# Altium PCB BOOST-DRV8711.PcbDoc
Units mil, origin at the board's own origin, x right, y up, seen from the top; angles counter-clockwise.
Board outline 2000 x 1750 mil, 2 copper layers (Top Layer, Bottom Layer), stack 64.8 mil thick; 30 components, 42 nets, 138 pads, 203 vias.
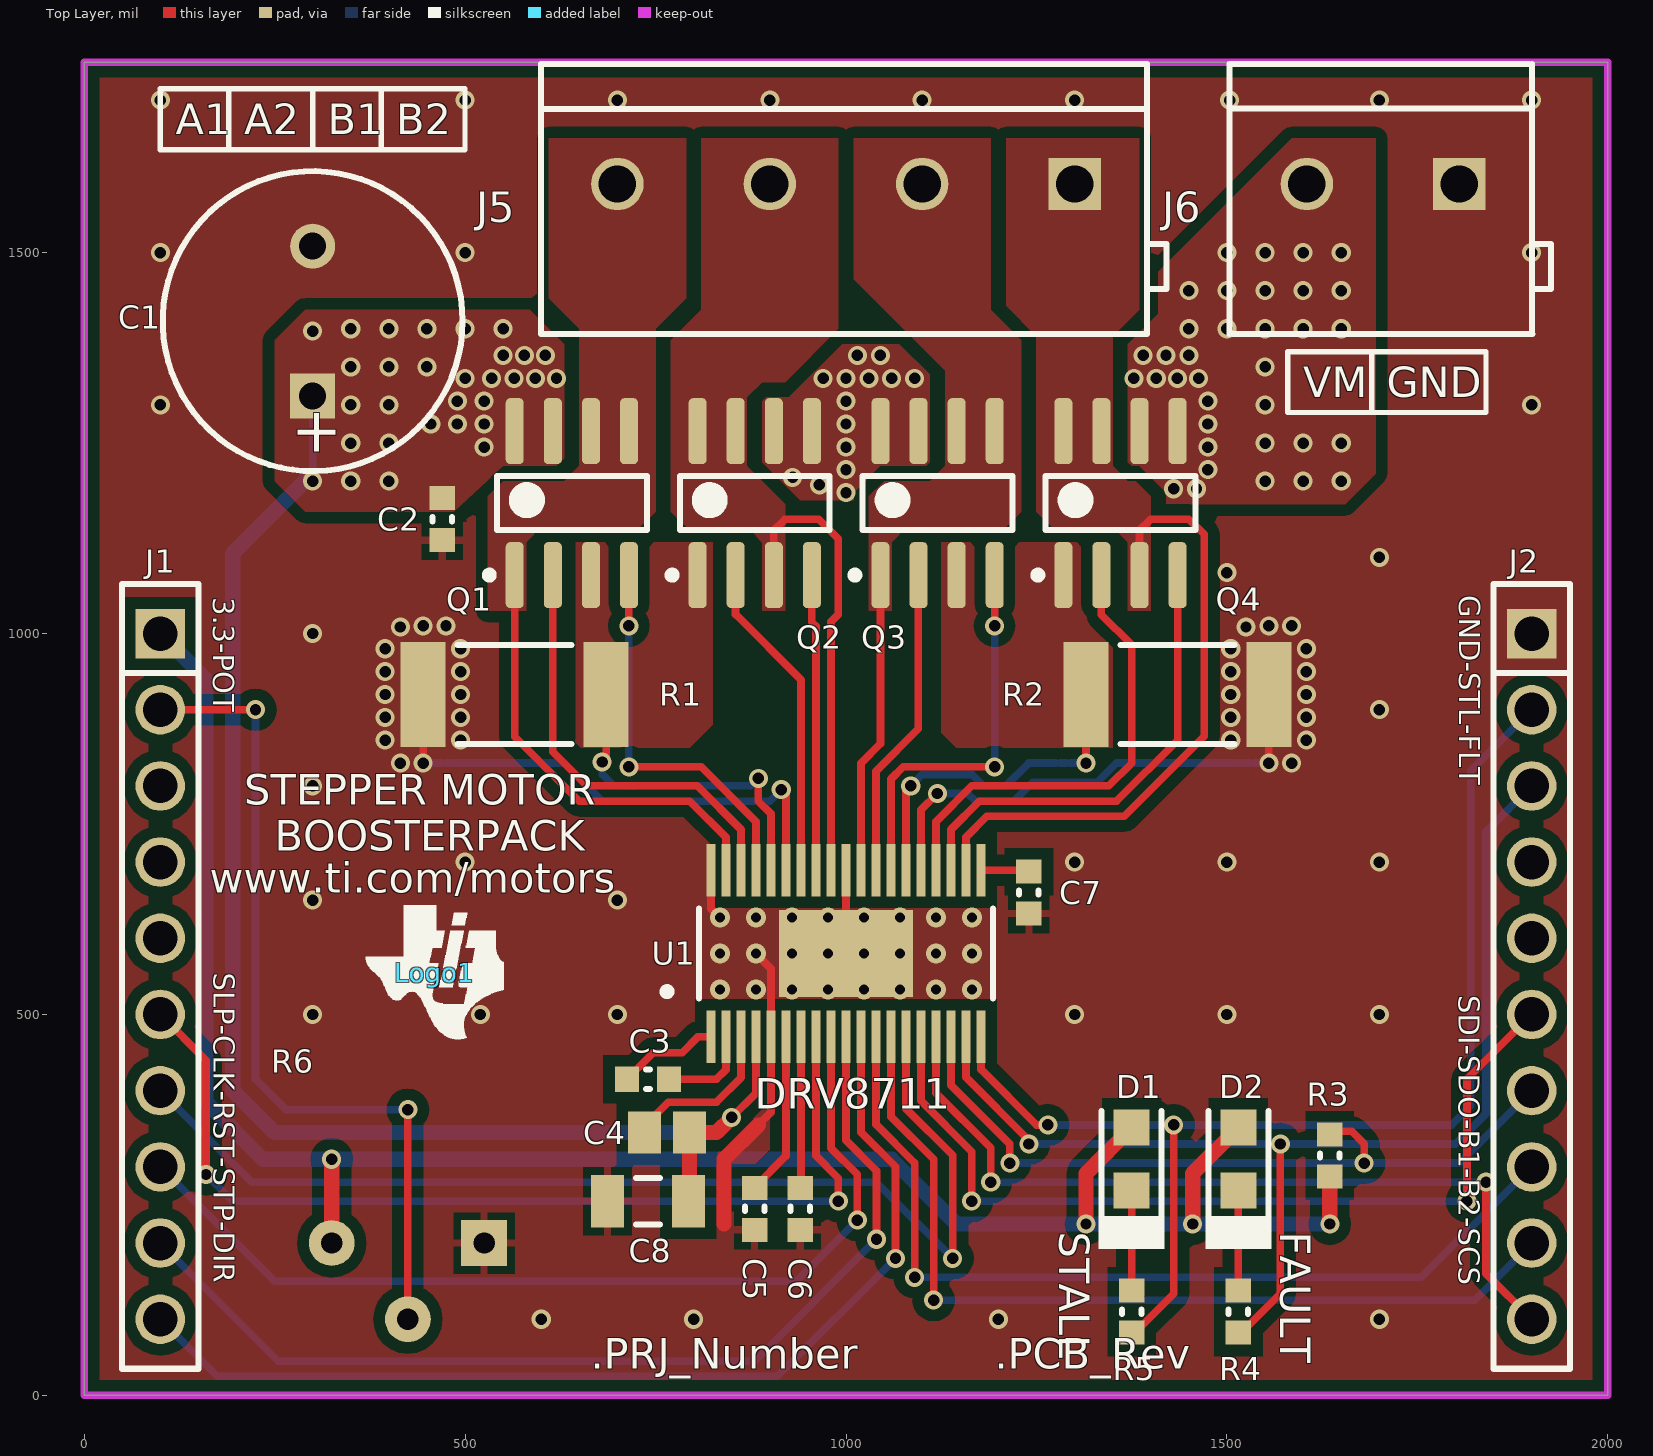
[diagram p0: Top Layer view]
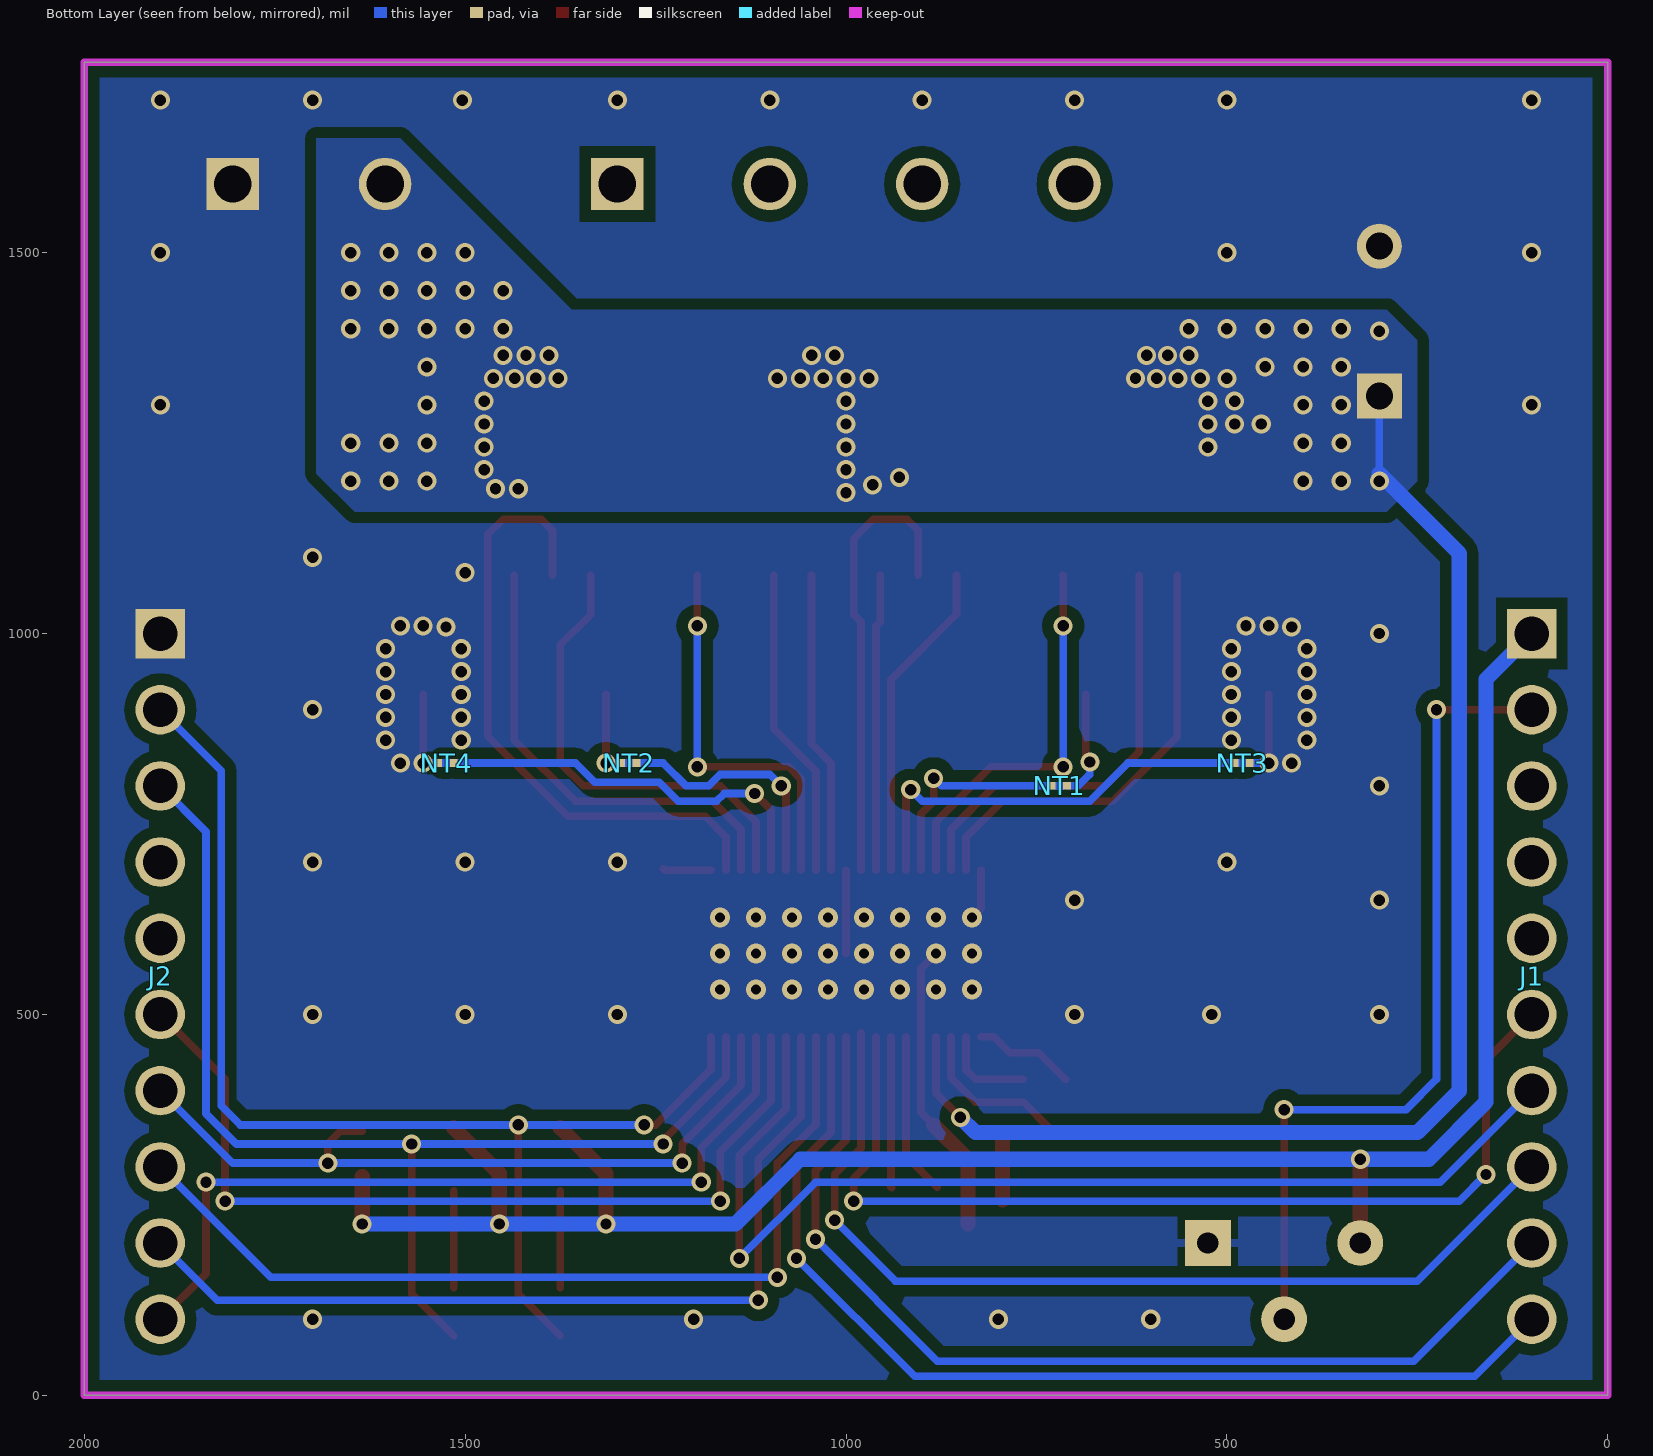
[diagram p1: Bottom Layer view, seen from below]

## Layer stack, top to bottom
Top Layer: signal copper 2.8
Dielectric: core 59.2, FR-4, Dk 4.8
Bottom Layer: signal copper 2.8

## Board outline
0,0 2000,0 2000,1750 0,1750

## Design rules (kind name [scope] priority, off if disabled: settings)
AcuteAngle [All] p1: minimum=4.50000000000000E+0001 checktracksonly=FALSE
AssemblyTestPointUsage [All] p1: valid=2
Clearance Clearance_BoardEdge_MountingHoles [OnCopper and InComponentClass('Mounting Holes') vs IsKeepOut] p1: gap=15
Clearance Clearance_BoardEdge_Poly [OnCopper and InPoly vs IsKeepOut] p2: gap=15
Clearance Clearance_BoardEdge [OnCopper and Not InComponentClass('Logo') and not InComponentClass('FiducialMark') and not InRegion(1000,500,4000,800) and Not IsKeepout vs IsKeepOut] p3: gap=15
Clearance Clearance_Poly [InPolygon] p4: gap=15
Clearance [All] p5: gap=7
ComponentClearance ComponentClearance_Logo [InComponentClass(Logo)] p1: gap=10 collisioncheckmode=3 verticalgap=10 showdistances=FALSE
ComponentClearance ComponentClearance_ScrewToNut [(HasFootprint('NY PMS 440 0025 PH')) vs (HasFootprint('Keystone_1902C'))] p2: gap=5 collisioncheckmode=3 verticalgap=10 showdistances=FALSE
ComponentClearance ComponentClearance_MountingHoles [InComponentClass('Mounting Holes')] p3: gap=250 collisioncheckmode=3 verticalgap=100000 showdistances=FALSE
ComponentClearance ComponentClearance_SmallPassives [HasFootprint('0201*') or HasFootprint('0402*') or HasFootprint('0508') or HasFootprint('0603*') or HasFootprint('0612') or HasFootprint('0805*') or HasFootprint('0815*') or HasFootprint('0830*') or HasFootprint('1206*') or HasFootprint('1210*') or HasFootprint('1808*') or HasFootprint('1812*') or HasFootprint('1825*') or HasFootprint('2010*') or HasFootprint('2220*') or HasFootprint('2225*') or HasFootprint('2512*') or HasFootprint('2728*') or HasFootprint('3518*') vs HasFootprint('0201*') or HasFootprint('0402*') or HasFootprint('0508') or HasFootprint('0603*') or HasFootprint('0612') or HasFootprint('0805*') or HasFootprint('0815*') or HasFootprint('0830*') or HasFootprint('1206*') or HasFootprint('1210*') or HasFootprint('1808*') or HasFootprint('1812*') or HasFootprint('1825*') or HasFootprint('2010*') or HasFootprint('2220*') or HasFootprint('2225*') or HasFootprint('2512*') or HasFootprint('2728*') or HasFootprint('3518*')] p4: gap=10 collisioncheckmode=3 verticalgap=10 showdistances=FALSE
ComponentClearance ComponentClearance_THtoSMT [IsThruComponent vs IsSMTComponent] p5: gap=10 collisioncheckmode=3 verticalgap=100000 showdistances=FALSE
ComponentClearance ComponentClearance_THtoTH [IsThruComponent vs IsThruComponent] p6: gap=0 collisioncheckmode=3 verticalgap=0 showdistances=FALSE
ComponentClearance [All] p7: gap=10 collisioncheckmode=3 verticalgap=10 showdistances=FALSE
DiffPairsRouting [All] p1: maxlimit=100 minlimit=10 mostfreqgap=10 maxuncoupledlength=1000
FabricationTestPointUsage TestPointUsage [All] p1: valid=2 allowmultiple=FALSE
FabricationTestpoint Testpoint [All] p1: side=3 testpointundercomponent=TRUE minsize=40 maxsize=100 preferedsize=60 minholesize=0 maxholesize=40 preferedholesize=32 testpointgrid=1 allowsidetop=TRUE allowsidebottom=TRUE usegrid=TRUE gridtolerance=0.01
FanoutControl Fanout_LCC [IsLCC] p1: bgadir=Out bgaviamode=Centered fanoutstyle=Auto fanoutdirection=Alternating viagrid=1 // Fanout_LCC (Default Rule)
FanoutControl Fanout_BGA [IsBGA] p2: bgadir=Out bgaviamode=Centered fanoutstyle=Auto fanoutdirection=Alternating viagrid=1 // Fanout_BGA (Default Rule)
FanoutControl Fanout_Default [All] p4: bgadir=Out bgaviamode=Centered fanoutstyle=Auto fanoutdirection=Alternating viagrid=1 // Fanout_Default (Default Rule)
FanoutControl Fanout_Small [(CompPinCount < 5)] p5: bgadir=Out bgaviamode=Centered fanoutstyle=Auto fanoutdirection=OutThenIn viagrid=1 // Fanout_Small (Default Rule)
HoleSize [All] p1: absolutevalues=TRUE maxlimit=251 minlimit=8 maxpercent=80.000 minpercent=20.000
MinimumAnnularRing [All] p1: minimumring=5
MinimumSolderMaskSliver MinimumSolderMaskSliver_Logo [InComponentClass('Logo') vs InComponentClass('Logo')] p1: minsoldermaskwidth=0.7
MinimumSolderMaskSliver [All] p2: minsoldermaskwidth=3
PlaneClearance [All] p1: clearance=15
PlaneConnect [All] p1: planeconnectstyle=Relief reliefexpansion=10 reliefentries=4 reliefconductorwidth=10 reliefairgap=10
PolygonConnect PolygonConnect_1 [IsNamedPolygon('GND_TOP') or IsNamedPolygon('GND_BOT') vs Not (InComponent('U1') or InComponent('J2') or InComponent('J3') or InComponent('J5') or InComponent('C1') or InComponent('R1') or InComponent('R2') or IsStitchingVia or IsVia)] p1: connectstyle=Relief reliefconductorwidth=10 reliefentries=4 polygonreliefangle="90 Angle" airgapwidth=10
PolygonConnect [All] p2: connectstyle=Direct reliefconductorwidth=10 reliefentries=4 polygonreliefangle="90 Angle" airgapwidth=10
RoutingVias [All] p1: holewidth=15 width=25 viastyle="Through Hole" minholewidth=8 minwidth=20 maxholewidth=40 maxwidth=65
SMDToCorner [All] p1: distance=30000
SilkToSilkClearance [All] p1: silktosilkclearance=5
SilkscreenOverComponentPads [All] p1: minsilkscreentomaskgap=5
SolderMaskExpansion [All] p1: expansion=3
Width [All] p1: maxlimit=100 minlimit=6 preferedwidth=10 checkconnectedcopper=TRUE
13 further rules are at their usual default settings.

## Classes and differential pairs
component class Logo: Logo1

## Components (designator, comment, footprint, x,y, rotation, side; value= is the part's Value field where it differs from the comment)
C1 "ECA-2AM101" CAPPR5-10X20 300,1410 r90 top
C2 "C1608X7R2A103K" 0603L 470,1150 r270 top
C3 "GRM188R72A104KA35D" 0603L 740,415 r0 top
C4 "CL21B105KBFNNNE" 0805L 765,345 r0 top
C5 "C1608X7R1E104K" 0603L 880,245 r270 top
C6 "C1608X7R1C105K" 0603L 940,245 r270 top
C7 "C0603C102K4RACTU" 0603L 1240,660 r270 top
C8 "HMK316B7105KL-T" 1206L 740,255 r180 top
D1 "LTST-C170KRKT" LED_LTST-C170 1375,310 r270 top
D2 "LTST-C170KRKT" LED_LTST-C170 1515,310 r270 top
J1 "CRD-081413-B-T" CONN_SSW-110-23-F-S 100,1000 r90 bottom
J2 "CRD-081413-B-T" CONN_SSW-110-23-F-S 1900,1000 r90 bottom
J5 "OSTTA024163" CONN_ED120-2DS 1705,1590 r90 top
J6 "OSTTA044163" CONN_ED120_4DS 1000,1590 r270 top
Logo1 "Texas Instruments" TI_Symbol_Overlay_Small 460,555 r0 top
NT1 "Net-Tie" Net-Tie_10mil 720,800 r180 bottom net-tie
NT2 "Net-Tie" Net-Tie_10mil 1285,830 r0 bottom net-tie
NT3 "Net-Tie" Net-Tie_10mil 480,830 r180 bottom net-tie
NT4 "Net-Tie" Net-Tie_10mil 1525,830 r0 bottom net-tie
Q1 "CSD88537ND" SO-8 640.23,1171.12 r90 top
Q2 "CSD88537ND" SO-8 880.23,1171.12 r90 top
Q3 "CSD88537ND" SO-8 1120.23,1171.12 r90 top
Q4 "CSD88537ND" SO-8 1360.23,1171.12 r90 top
R1 "CRA2512-FZ-R050ELF" 2512M 565,920 r0 top
R2 "CRA2512-FZ-R050ELF" 2512M 1435,920 r180 top
R3 "CRCW06033K30JNEA" 0603L 1635,315 r270 top
R4 "CRCW0603330RJNEA" 0603L 1515,110 r270 top
R5 "CRCW0603330RJNEA" 0603L 1375,110 r90 top
R6 "3386P-104TLF-ND" POT_3386P 425,200 r90 top
U1 "DRV8711DCP" R-PDSO-G38 1000,580 r90 top

## Footprints (in the part's own frame and the unit in brackets; to place one, negate y for a bottom-side part, rotate by r counter-clockwise, add the part's x,y. Pads: shape width x height; smd on the part's side, far side on the other; paste and mask are expansions set on the pad)
0603L [mm] "0603 from SM-752 data"
  rect 0.8x0.85 smd: 1(-0.7,0) 2(0.7,0)
  silkscreen extent -0.07,-0.33 0.07,0.33, body extent -0.87,-0.47 0.87,0.47, height 0.85
0805L [mm] "0805 from SM-752 data"
  rect 1.1x1.4 smd: 1(-0.75,0) 2(0.75,0)
  body extent -1.1,-0.72 1.1,0.72, height 1.1
1206L [mm] "1206 from SM-752 data"
  rect 1.1x1.75 smd: 1(-1.35,0) 2(1.35,0)
  silkscreen extent -0.4,-0.77 0.4,0.77, body extent -1.7,-0.9 1.7,0.9, height 1.35
2512M [mm] "Chip Resistor, Body 6.3x3.2mm, IPC Low Density"
  rect 1.5x3.5 smd: 1(-3.05,0) 2(3.05,0)
  silkscreen extent -1.9,-1.65 1.9,1.65, body extent -3.22,-1.67 3.22,1.67, height 0.71
CAPPR5-10X20 [mm] "Capacitor, Electrolytic, Radial; Body 10 x 20 mm (Dia.xH typ); Pin Spacing 5 mm (typ)"
  rect 1.5x1.5 hole 0.9: 1(-2.5,0)
  round 1.5 hole 0.9: 2(2.5,0)
  silkscreen extent -5,-5 5,5, body extent -5.01,-5.01 5.01,5.01, height 22
CONN_ED120-2DS [mm] "ONSHORE"
  rect 1.75x1.75 hole 1.25: 1(0,-2.54)
  round 1.75 hole 1.25: 2(0,2.54)
  silkscreen extent -5,-5.6 4,5.12, body extent -5,-5.6 4.15,5.12, height 13.1
CONN_ED120_4DS [mm] "ONSHORE"
  rect 1.75x1.75 hole 1.25: 1(0,7.62)
  round 1.75 hole 1.25: 2(0,2.54) 3(0,-2.54) 4(0,-7.62)
  silkscreen extent -4,-10.16 5,10.68, body extent -4.13,-10.01 5.05,10.68, height 13.1
CONN_SSW-110-23-F-S [mm] "SAMTEC"
  rect 1.65x1.65 hole 1.15: 1(0,0)
  round 1.65 hole 1.15: 2(-2.54,0) 3(-5.08,0) 4(-7.62,0) 5(-10.16,0) 6(-12.7,0) 7(-15.24,0) 8(-17.78,0) 9(-20.32,0) 10(-22.86,0)
  body extent -24.43,-1.27 1.57,1.27, height 8.59
LED_LTST-C170 [mm] "LITE-ON"
  rect 1.2x1.2 smd: 1(-1.05,0) 2(1.05,0)
  silkscreen extent -1.6,-1.1 3,1.1, body extent -1.05,-0.67 1.05,0.67, height 1.1
Net-Tie_10mil [mil] "10mil net tie, no solder mask opening, no solder paste"
  rect 10x10 smd paste-5 mask-5: 1(-10,0) 2(10,0)
  Top Layer region: -6,5 6,5 6,-5 -6,-5
POT_3386P [mil]
  rect 60x60 hole 28: 1(0,-100)
  round 60 hole 28: 2(-100,0) 3(0,100)
R-PDSO-G38 [mm] "PowerPAD Plastic Small-Outline Package"
  rect 2.9x4.48 smd: 0(0,0)
  rect 1.75x0.3 smd mask+0.05: 1(-2.775,4.5) 2(-2.775,4) 3(-2.775,3.5) 4(-2.775,3) 5(-2.775,2.5) 6(-2.775,2) 7(-2.775,1.5) 8(-2.775,1) 9(-2.775,0.5) 10(-2.775,0) 11(-2.775,-0.5) 12(-2.775,-1) 13(-2.775,-1.5) 14(-2.775,-2) 15(-2.775,-2.5) 16(-2.775,-3) 17(-2.775,-3.5) 18(-2.775,-4) 19(-2.775,-4.5) 20(2.775,-4.5) 21(2.775,-4) 22(2.775,-3.5) 23(2.775,-3) 24(2.775,-2.5) 25(2.775,-2) 26(2.775,-1.5) 27(2.775,-1) 28(2.775,-0.5) 29(2.775,0) 30(2.775,0.5) 31(2.775,1) 32(2.775,1.5) 33(2.775,2) 34(2.775,2.5) 35(2.775,3) 36(2.775,3.5) 37(2.775,4) 38(2.775,4.5)
  silkscreen extent -1.5,-4.9 1.5,6.09, body extent -2.25,-4.9 2.25,4.9, height 1.2
SO-8 [mm] "SOIC, 8-Leads, Body 5.0x4.0mm (max), Pitch 1.27mm, IPC Medium Density"
  rrect50% 2.2x0.6 smd: 1(-2.4,1.905) 2(-2.4,0.635) 3(-2.4,-0.635) 4(-2.4,-1.905) 5(2.4,-1.905) 6(2.4,-0.635) 7(2.4,0.635) 8(2.4,1.905)
  silkscreen extent -2.52,-2.5 0.9,2.88, body extent -3,-2.45 3,2.45, height 1.59
TI_Symbol_Overlay_Small [mil]
  silkscreen extent -90,-88 91,88

## Part data
C1: library part EEV-FK2A101M, "CAP ALUM 100UF 100V 20% RADIAL"
C2: "CAP, CERM, 0.01uF, 100V, +/-10%, X7R, 0603"
C3: "CAP, CERM, 0.1uF, 100V, +/-10%, X7R, 0603"
C4: library part GRM21BR71H105KA12L, "CAP CER 1UF 50V 10% X7R 0805"
C5: "CAP, CERM, 0.1uF, 25V, +/-10%, X7R, 0603"
C6: "CAP, CERM, 1uF, 16V, +/-10%, X7R, 0603"
C7: library part GRM188R71C102KA01D, "CAP, CERM, 1000pF, 16V, +/-10%, X7R, 0603"
C8: library part GRM31CR72A105KA01L, "CAP CER 1UF 100V 10% X7R 1206"
D1 D2: "LED, Red, SMD"
J1 J2: library part SSW-110-23-F-S, "Connector, Receptacle, 100mil, 10x1, Gold plated, TH"
J5: library part ED120/2DS, "TERMINAL BLOCK 5.08MM VERT 2POS, TH"
J6: library part ED120/4DS, "Terminal Block, 4x1, 5.08mm, TH"
Logo1: library part TI_Logo, "Texas Instrument Corporate Signature"
NT1 NT2 NT3 NT4: "Single point connection between nets."
Q1 Q2 Q3 Q4: "Dual 60-V N-Channel NexFET™ Power MOSFETs"
R1 R2: "RES, 0.05 ohm, 1%, 3W, 2512"
R3: "RES, 3.3k ohm, 5%, 0.1W, 0603"
R4 R5: "RES, 330 ohm, 5%, 0.1W, 0603"
R6: library part POT_3386P, "TRIMMER 100K OHM 0.5W PC PIN"
U1: "Stepper Motor Pre-Driver with On-Chip 1/256 Micro-Stepping Indexer and Stall Detect"

## Via types
v1: diameter 25, hole 15, Top Layer to Bottom Layer, tented both sides, 179 vias
v2: diameter 26, hole 13, Top Layer to Bottom Layer, tented top, 24 vias

## Nets (pads, with @x,y where several pads share a name; then routed paths per layer and width w, separated by ;. In a path a pad name is that pad's centre, name@x,y a point inside that pad or via, vN(x,y) a via of type N, cw(c..) or ccw(c..) an arc to the next point about the centre after c; other vN are vias at no path point)
3.3V: D1.1 D2.1 J1.1 R3.2 R6.3 | length 2656
  Top Layer w20: R6.3 v1(325,310) ; v1(1315,225) 1315,291.34 D1.1 ; v1(1455,225) 1455,291.34 D2.1 ; v1(1635,225) R3.2
  Bottom Layer w20: J1.1 160,940 160,385 235,310 1060,310 1145,225 v1(1455,225) v1(1635,225)
A1HS: Q1.2 U1.36 | length 574.5
  Top Layer w10: Q1.2@615,1076.4 615,845 660,800 805,800 862.2,742.8 U1.36
A1LS: Q1.4 U1.35 | length 512.3
  Top Layer w10: v1(715,825) 810,825 881.89,753.11 U1.35 ; v1(715,1010) 715,1076.4 Q1.4
  Bottom Layer w10: v1(715,825) v1(715,1010)
A2HS: Q2.4 U1.31 | length 389.6
  Top Layer w10: Q2.4 955.23,1014.77 960.63,1009.37 U1.31
A2LS: Q2.2 U1.32 | length 422.8
  Top Layer w10: Q2.2@855,1076.4 855,1025 940.94,939.06 U1.32
AISENN: NT3.1 U1.33 | length 560.3
  Top Layer w10: v1(915,795) 921.26,788.74 U1.33
  Bottom Layer w10: NT3.1 630,830 680,780 900,780 v1(915,795)
AISENP: NT1.1 U1.34 | length 286.8
  Top Layer w10: v1(885,810) 885,780 901.57,763.43 U1.34
  Bottom Layer w10: NT1.1 875,800 v1(885,810)
AOUT1: J6.4 Q1.1 Q1.5 Q1.6 U1.37 | length 587.2
  Top Layer w10: Q1.1 565.23,864.77 650,780 795,780 842.52,732.48 U1.37
AOUT2: J6.3 Q2.3 Q2.7 Q2.8 U1.30 | length 599.2
  Top Layer w10: Q2.3 905.23,1135.23 920,1150 964.34,1150 990,1124.34 990,1024.99 980.31,1015.3 U1.30
B1HS: Q3.2 U1.27 | length 410.2
  Top Layer w10: U1.27 1039.37,819.37 1095,875 Q3.2@1095,1076.4
B1LS: Q3.4 U1.26 | length 514.1
  Top Layer w10: U1.26 1059.06,809.06 1075,825 v1(1195,825) ; v1(1195,1010) 1195,1076.4 Q3.4
  Bottom Layer w10: v1(1195,825) v1(1195,1010)
B2HS: Q4.4 U1.22 | length 616
  Top Layer w10: U1.22 1137.8,742.8 1175,780 1355,780 1435.23,860.23 Q4.4
B2LS: Q4.2 U1.23 | length 615.7
  Top Layer w10: U1.23 1118.11,753.11 1165,800 1345,800 1375,830 1375,985 1335.23,1024.77 Q4.2
BEMF: C7.1 U1.20 | length 63.8
  Top Layer w10: U1.20 1237.76,689.25 C7.1@1240,691.5
BIN1: J2.8 U1.12 | length 1206.8
  Top Layer w10: U1.12 1039.37,355.63 1090,305 v1(1090,155)
  Bottom Layer w10: v1(1090,155) 1755,155 J2.8
BIN2: J2.9 U1.13 | length 1185
  Top Layer w10: U1.13 1059.06,365.94 1115,310 v1(1115,125)
  Bottom Layer w10: v1(1115,125) 1825,125 J2.9
BISENN: NT4.1 U1.24 | length 529.5
  Top Layer w10: U1.24 1098.43,768.43 v1(1120,790)
  Bottom Layer w10: v1(1120,790) 1160,790 1170,780 1220,780 1245,805 1330,805 1355,830 NT4.1
BISENP: NT2.1 U1.25 | length 328.2
  Top Layer w10: U1.25 1078.74,793.74 v1(1085,800)
  Bottom Layer w10: v1(1085,800) 1100,815 1165,815 1180,800 1210,800 1240,830 NT2.1
BOUT1: J6.2 Q3.1 Q3.5 Q3.6 U1.28 | length 398
  Top Layer w10: U1.28 1019.68,829.68 1045.23,855.23 Q3.1
BOUT2: J6.1 Q4.3 Q4.7 Q4.8 U1.21 | length 833.4
  Top Layer w10: U1.21 1157.48,732.48 1185,760 1365,760 1470,865 1470,1130 1450,1150 1400,1150 1385.23,1135.23 Q4.3
CP1: C3.1 U1.1 | length 134
  Top Layer w10: C3.1@711.95,415 746.95,450 785,450 805.75,470.75 U1.1
CP2: C3.2 U1.2 | length 123.4
  Top Layer w10: C3.2 830,415 842.52,427.52 U1.2
DIR/AIN2: J1.10 U1.11 | length 1369.8
  Top Layer w10: U1.11 1019.68,345.32 1065,300 v1(1065,180)
  Bottom Layer w10: J1.10 175,25 910,25 v1(1065,180)
GND: C1.2 C2.2 C5.2 C6.2 C7.2 C8.2 J2.1 J5.1 NT3.2 NT4.2 R1.1 R2.1 R6.1 U1.0 U1.5 U1.29 U1.38 | length 789.9
  Top Layer w10: R1.1 445,919.92 v1(445,830) ; U1.38 822.83,639.06 v2(834.65,627.24) ; v2(881.89,580) 901.57,560.31 U1.5 901.57,371.57 885,355 ; U1.0 U1.29 ; v1(1555,830) 1555,919.92 R2.1
  Top Layer w20: 840,225 840,310 885,355
  Bottom Layer w10: v1(445,830) NT3.2 ; NT4.2 v1(1555,830)
  other v1: 600,100 800,100 1200,100 1700,100 300,500 520,500 700,500 1300,500 1500,500 1700,500 300,650 700,650 500,700 1300,700 1500,700 1700,700 300,800 415,830 1585,830 395,860 494.29,860 1505,860 1604.29,860 395,890 494.29,890 1505,890 1604.29,890 1700,900 395,920 494.29,920 1505,920 1604.29,920 395,950 494.29,950 1505,950 1604.29,950 395,980 494.29,980 1505,980 1604.29,980 300,1000 415,1008.58 1525,1008.58 445,1010 475,1010 1555,1010 1585,1010 1500,1080 1700,1100 100,1300 1900,1300 100,1500 500,1500 1900,1500 100,1700 500,1700 700,1700 900,1700 1100,1700 1300,1700 1503.62,1700 1700,1700 1900,1700
  other v2: 834.65,532.76 881.89,532.76 929.13,532.76 976.38,532.76 1023.62,532.76 1070.87,532.76 1118.11,532.76 1165.35,532.76 834.65,580 929.13,580 976.38,580 1023.62,580 1070.87,580 1118.11,580 1165.35,580 881.89,627.24 929.13,627.24 976.38,627.24 1023.62,627.24 1070.87,627.24 1118.11,627.24 1165.35,627.24
GND_A: NT1.2 Q1.3 Q2.1 R1.2 | length 143.3
  Top Layer w10: v1(680,831.42) 685.08,836.5 R1.2
  Bottom Layer w10: v1(680,831.42) 680,815 695,800 NT1.2
GND_B: NT2.2 Q3.3 Q4.1 R2.2 | length 110
  Top Layer w10: R2.2 1315,919.92 v1(1315,830)
  Bottom Layer w10: NT2.2 v1(1315,830)
NetD1_2: D1.2 R5.2 | length 127.2
  Top Layer w10: R5.2@1375,141.5 D1.2
NetD2_2: D2.2 R4.1 | length 127.2
  Top Layer w10: R4.1@1515,141.5 D2.2
NFAULT: J2.3 R4.2 U1.18 | length 1520.6
  Top Layer w10: U1.18 1157.48,417.52 1240,335 v1(1240,330) ; R4.2@1515,78.5 1570,133.5 v1(1570,330)
  Bottom Layer w10: v1(1240,330) 1800,330 1840,370 1840,740 J2.3
NSLEEP: J1.6 U1.8 | length 1307.3
  Top Layer w10: J1.6 160,440 v1(160,290) ; U1.8 960.63,314.37 990,285 v1(990,255)
  Bottom Layer w10: v1(160,290) 195,255 v1(990,255)
NSTALL: J2.2 R5.1 U1.19 | length 1578.7
  Top Layer w10: U1.19 1177.17,427.83 1250,355 v1(1265,355) ; R5.1@1375,78.5 1430,133.5 v1(1430,355)
  Bottom Layer w10: v1(1265,355) 1795,355 1820,380 1820,820 J2.2
POT: J1.2 R6.2 | length 1101.6
  Top Layer w10: J1.2 v1(225,900) ; R6.2 v1(425,375)
  Bottom Layer w10: v1(225,900) 225,415 265,375 v1(425,375)
RESET: J1.8 U1.9 | length 1270.4
  Top Layer w10: U1.9@980.31,475.75 980.31,324.69 1015,290 v1(1015,230)
  Bottom Layer w10: J1.8 250,150 935,150 v1(1015,230)
SCLK: J1.7 U1.14 | length 1447.2
  Top Layer w10: U1.14 1078.74,376.26 1140,315 v1(1140,180)
  Bottom Layer w10: J1.7 220,280 1040,280 v1(1140,180)
SCS: J2.10 U1.16 | length 1070.4
  Top Layer w10: U1.16 1118.11,396.89 1190,325 v1@1190,285 ; v1(1840,280) 1840,160 J2.10
  Bottom Layer w10: v1(1190,280) v1(1840,280)
SDATI: J2.6 U1.15 | length 1173.5
  Top Layer w10: U1.15 1098.43,386.57 1165,320 v1(1165,255) ; v1(1815,255) 1815,415 J2.6
  Bottom Layer w10: v1(1165,255) v1(1815,255)
SDATO: J2.7 R3.1 U1.17 | length 988.9
  Top Layer w10: U1.17 1137.8,407.2 1215,330 v1@1215,315 ; R3.1@1635,346.5 1663.5,346.5 1680,330 v1(1680,305)
  Bottom Layer w10: v1(1215,305) v1(1680,305) 1805,305 J2.7
STEP/AIN1: J1.9 U1.10 | length 1352.8
  Top Layer w10: U1.10 1000,335 1040,295 v1(1040,205)
  Bottom Layer w10: J1.9 255,45 880,45 v1(1040,205)
V5: C5.1 U1.6 | length 214.8
  Top Layer w10: C5.1@880,273.05 921.26,314.31 U1.6
VCP: C4.1 U1.3 | length 210.2
  Top Layer w10: C4.1@733,351 767,385 830,385 862.2,417.2 U1.3
VINT: C6.1 U1.7 | length 198.6
  Top Layer w10: C6.1 940.94,273.5 U1.7
VM: C1.1 C2.1 C4.2 C8.1 J5.2 Q1.7 Q1.8 Q2.5 Q2.6 Q3.7 Q3.8 Q4.5 Q4.6 U1.4 | length 1912.5
  Top Layer w10: v1(850,365) 881.89,396.89 U1.4
  Top Layer w20: C8.1@794.53,256.38 C4.2 830,345 v1(850,365)
  Bottom Layer w10: v1@300,1210 C1.1
  Bottom Layer w20: v1@300,1210 195,1105 195,400 250,345 830,345 v1(850,365)
  other v1: 1000,1185 1430,1190 1460,1190 965,1195 300,1200 350,1200 400,1200 1550,1200 1600,1200 1650,1200 930,1205 1000,1215 1475,1215 525,1244.53 1000,1244.53 1475,1244.53 350,1250 400,1250 1550,1250 1600,1250 1650,1250 455,1275 490,1275 525,1275 1000,1275 1475,1275 350,1300 400,1300 1550,1300 490,1305 525,1305 1000,1305 1475,1305 500,1335 535,1335 564.44,1335 592.22,1335 620,1335 970,1335 1000,1335 1030,1335 1060,1335 1090,1335 1377.78,1335 1407.22,1335 1435,1335 1462.78,1335 350,1350 400,1350 450,1350 1550,1350 550,1365 577.74,1365 605.47,1365 1015,1365 1045,1365 1390,1365 1420,1365 1450,1365 300,1396.78 350,1400 400,1400 450,1400 500,1400 550,1400 1450,1400 1500,1400 1550,1400 1600,1400 1650,1400 1450,1450 1500,1450 1550,1450 1600,1450 1650,1450 1500,1500 1550,1500 1600,1500 1650,1500
pads on no net: J1.3 J1.4 J1.5 J2.4 J2.5

## Polygon pours and split planes (outlines as drawn)
VM on Top Layer "VM_TOP3" (solid, remove dead copper, pour order 24): 1370,1380 1410,1420 1410,1475 1585,1650 1695,1650 1695,1210 1655,1170 1420,1170 1420,1185 1385,1220 1375,1220 1370,1225
VM on Top Layer "VM_TOP1" (solid, remove dead copper, pour order 22): 630,1380 630,1230 620,1220 550,1220 485,1160 290,1160 250,1200 250,1385 290,1425 585,1425
BOUT2 on Top Layer "BOUT2" (solid, remove dead copper, pour order 20): 1250,1160 1270,1140 1350,1140 1370,1120 1370,1030 1400,1030 1400,1180 1380,1200 1370,1200 1350,1220 1350,1390 1385,1425 1385,1650 1210,1650 1210,1430 1250,1390
AOUT1 on Top Layer "AOUT1" (solid, remove dead copper, pour order 17): 600,1140 580,1120 580,1030 530,1030 530,1180 550,1200 630,1200 650,1220 650,1400 610,1440 610,1650 790,1650 790,1440 750,1400 750,1160 730,1140
AOUT2 on Top Layer "AOUT2" (solid, remove dead copper, pour order 18): 770,1160 790,1140 870,1140 880,1130 890,1118.58 890,1030 920,1030 920,1170 870,1220 870,1310 890,1330 920,1330 990,1400 990,1650 810,1650 810,1425 770,1385
VM on Top Layer "VM_TOP2" (solid, remove dead copper, pour order 23): 890,1225 890,1305 895,1310 925,1310 995,1380 1070,1380 1110,1340 1110,1225 1105,1220 1045,1220 1010,1185 1010,1175 940,1175
GND_A on Top Layer "GND_A" (solid, remove dead copper, pour order 12): 645,1120 825,1120 825,880 795,850 644.84,850 645,865
GND_B on Top Layer "GND_B" (solid, remove dead copper, pour order 14): 1305,1120 1125,1120 1125,870 1145,850 1350,850 1350,1120
BOUT1 on Top Layer "BOUT1" (solid, remove dead copper, pour order 19): 1080,1140 1210,1140 1230,1160 1230,1385 1190,1425 1190,1650 1010,1650 1010,1465 1130,1345 1130,1220 1110,1200 1050,1200 1030,1180 1030,1030 1059.92,1030 1060,1120
GND on Top Layer "GND_TOP" (solid, remove dead copper, pour order 32): 0,1750 2000,1750 2000,0 0,0
VM on Bottom Layer "VM_BOT" (solid, remove dead copper, pour order 21): 290,1425 250,1385 250,1200 290,1160 1645,1160 1695,1210 1695,1650 1585,1650 1360,1425
GND on Bottom Layer "GND_BOT" (solid, remove dead copper, pour order 31): 0,1750 2000,1750 2000,0 0,0

## Keep-outs
Keep-Out Layer:
  the board outline again, w10
  text ".Layer_Name" at 577,-858.49 h60

## Other copper
Top Layer:
  text ".Layer_Name" at 577,-858.49 h60
Bottom Layer:
  text ".Layer_Name" at 577,-858.49 h60

## Silkscreen, mask and mechanical layers (free items; w line width, h text height)
Top Overlay:
  lines w7: 190,1635 190,1715 ; 300,1635 300,1715 ; 390,1635 390,1715 ; 1690,1290 1690,1370 ; 100,1635 500,1635 500,1715 100,1715 100,1635 ; 1580,1290 1840,1290 1840,1370 1580,1370 1580,1290
  text "A1" at 120,1655 h40
  text "A2" at 210,1655 h40
  text "B1" at 320,1655 h40
  text "B2" at 410,1655 h40
  text "VM" at 1600,1310 h40
  text "GND" at 1710,1310 h40
  text "GND-STL-FLT" at 1805,1050 h28 r270
  text "3.3-POT" at 169.51,1047.48 h28 r270
  text "STEPPER MOTOR" at 210,775 h40
  text "BOOSTERPACK" at 250,715 h40
  text "www.ti.com/motors" at 165,660 h40
  text "SLP-CLK-RST-STP-DIR" at 170,555 h28 r270
  text "SDI-SDO-B1-B2-SCS" at 1804.24,525.32 h28 r270
  text "DRV8711" at 880,376.46 h40
  text "STALL" at 1280,215 h40 r270
  text "FAULT" at 1570,215 h40 r270
  text ".PRJ_Number" at 665,35 h40
  text ".PCB_Rev" at 1195,35 h40
  text ".Layer_Name" at 577,-858.49 h60
Bottom Overlay:
  text ".Layer_Name" at 577,-858.49 h60
Top Paste:
  text ".Layer_Name" at 577,-858.49 h60
Bottom Paste:
  text ".Layer_Name" at 577,-858.49 h60
Top Solder:
  text ".Layer_Name" at 577,-858.49 h60
  text ".Layer_Name" at 577,-858.49 h60
Bottom Solder:
  text ".Layer_Name" at 577,-858.49 h60
Drill Guide:
  text ".Layer_Name" at 577,-858.49 h60
M1 Board Outline:
  the board outline again, w10
  text ".Layer_Name" at 577,-858.49 h60
M2 Board Dimensions:
  rectangle: -0.5,-285.5 124.5,-160.5
  rectangle: 124.5,-410.5 499.5,-285.5
  lines w7: -0.5,-285.5 999.5,-285.5 ; 124.5,-410.5 124.5,-160.5 ; 249.5,-410.5 249.5,-160.5 ; 499.5,-410.5 499.5,-160.5 ; 749.5,-410.5 749.5,-160.5 ; -0.5,-410.5 999.5,-410.5 999.5,-160.5 -0.5,-160.5 -0.5,-410.5
  lines w10: -0.5,-475.5 -0.5,-455.5 ; 59.5,-485.5 -0.5,-465.5 ; 59.5,-445.5 -0.5,-465.5 ; 223.58,-465.5 -0.5,-465.5 ; 775.42,-465.5 999.5,-465.5 ; 939.5,-485.5 999.5,-465.5 ; 939.5,-445.5 999.5,-465.5 ; 999.5,-475.5 999.5,-455.5
  text "1000 (mil)" at 233.58,-501.49 h60
  text ".Layer_Name" at 577,-858.49 h60
M3 3D STEP Top:
  text ".Layer_Name" at 577,-858.49 h60
M4 3D STEP Bottom:
  text ".Layer_Name" at 577,-858.49 h60
M5 Assembly Top:
  lines w7: 2319,170.5 3444,170.5 ; 2319,293 3441.5,293 ; 2634,50.5 2634,413 ; 3019,50.5 2319,50.5 ; 3019,413 2319,413 ; 2319,50.5 3444,50.5 3444,413 2319,413 ; 2319,50.5 2319,413
  lines w10: -292,-930.17 6308,-930.17 ; -292,-726.83 6310,-726.83 ; -292,-523.5 -292,-1133.5 3713,-1133.5 6310,-1133.5 6310,-523.5 -291.5,-523.5 -291.5,-1133.5 1284,-1133.5 ; 2173,-1133.5 2173,-523.5 ; 3440,-726.83 3440,-523.5 ; 4280,-726.83 4280,-523.5 ; 4902,-1140 4902,-937.17
  text "TABLE 1" at 2706.5,448 h40
  text "Variant" at 2344,338 h40
  text "Label text" at 2779,338 h40
  text "001" at 2411.5,218 h40
  text "ChangeMe!" at 2689,215.5 h40
  text "002" at 2411.5,93 h40
  text "ChangeMe!" at 2684,90.5 h40
  text "COMPONENTS MARKED 'DNP' SHOULD NOT BE POPULATED." at 1153.5,-318.5 h60
  text "ASSEMBLY VARIANT:" at 1153,-434 h60
  text ".VariantName" at 2189,-434 h60
  text "PCB VIEWED FROM TOP SIDE" at -228.5,-655.67 h60
  text "BOARD #:" at 2248,-655.67 h60
  text ".PRJ_Number" at 2793.5,-655.67 h60
  text "REV:" at 3638,-655.67 h60
  text ".PCB_Rev" at 3929.5,-655.67 h60
  text "SVN REV:" at 4476,-655.67 h60
  text ".VersionControl_RevNumber" at 4982,-655.67 h60
  text "IGNORE ->" at -228.5,-858.49 h60
  text "PLOT NAME =" at -228.5,-1064.34 h60
  text ".plot_File_Name" at 577,-1064.34 h60
  text "GENERATED    :" at 2250,-1064.34 h60
  text ".Print_Date" at 3119.5,-1064.34 h60
  text ".Print_Time" at 3848.5,-1064.34 h60
  text "TEXAS INSTRUMENTS" at 5113,-1064.34 h60
M6 Assembly Bottom:
  lines w10: -292.5,-727.33 6309.5,-727.33 ; -290.5,-930.67 6309.5,-930.67 ; 1115.5,-1140.5 1115.5,-937.67 ; 1737.5,-727.33 1737.5,-524 ; 2577.5,-727.33 2577.5,-524 ; 3844.5,-1134 3844.5,-524 ; 4733.5,-1134 6309,-1134 6309,-524 -292.5,-524 -292.5,-1134 2304.5,-1134 6309.5,-1134 6309.5,-524
  text "COMPONENTS MARKED 'DNP' SHOULD NOT BE POPULATED." at 6102,-318 h60
  text ".VariantName" at 5058,-434 h60
  text "ASSEMBLY VARIANT:" at 6097,-434 h60
  text ".VersionControl_RevNumber" at 1035.5,-656.17 h60
  text "SVN REV:" at 1541.5,-656.17 h60
  text ".PCB_Rev" at 2088,-656.17 h60
  text "REV:" at 2379.5,-656.17 h60
  text ".PRJ_Number" at 3224,-656.17 h60
  text "BOARD #:" at 3769.5,-656.17 h60
  text "PCB VIEWED FROM BOTTOM SIDE" at 6246,-656.17 h60
  text "IGNORE ->" at 2547.85,-858.49 h60
  text "TEXAS INSTRUMENTS" at 904.5,-1064.84 h60
  text ".Print_Time" at 2169,-1064.84 h60
  text ".Print_Date" at 2898,-1064.84 h60
  text "GENERATED    :" at 3767.5,-1064.84 h60
  text ".plot_File_Name" at 5440.5,-1064.84 h60
  text "PLOT NAME =" at 6246,-1064.84 h60
M9 Title Sheet:
  drawing of 57 lines, arcs and shapes, not listed
  text "1" at 739.84,8036.5 h70
  text "2" at 3235.5,8036.5 h70
  text "3" at 5724.84,8036.5 h70
  text "4" at 8231.51,8036.5 h70
  text "5" at 10730.5,8036.5 h70
  text "6" at 13235.5,8036.5 h70
  text "A" at -416.5,6893.5 h70
  text "A" at 14383.5,6893.5 h70
  text "B" at -416.5,4513.5 h70
  text "B" at 14383.5,4513.5 h70
  text "C" at -416.5,2138.5 h70
  text "C" at 14383.5,2138.5 h70
  text "PROJECT TITLE:" at 11343.5,277.5 h45
  text ".PRJ_Title" at 11393.5,144.17 h70
  text "DESIGNED FOR:" at 11343.5,-23.5 h45
  text ".PRJ_Customer" at 11393.5,-163.5 h70
  text "D" at -416.5,-231.5 h70
  text "D" at 14383.5,-231.5 h70
  text "FILE NAME:" at 11343.5,-323.5 h45
  text ".PCB_File_Name_No_Path" at 11393.5,-443.5 h70
  text "Texas Instruments (TI) and/or its licensors do not warrant the accuracy or completeness of this specification" at 6374,-605.34 h45
  text "ENGINEER:" at 11343.5,-613.5 h45
  text "LAYOUT BY:" at 12848.5,-613.5 h45
  text "or any information contained therein. TI and/or its licensors do not warrant that this design will meet" at 6329.01,-718 h45
  text ".PRJ_Engineer" at 11393.5,-768.49 h70
  text ".PCB_Layout" at 12899,-768.49 h70
  text "the specifications, will be suitable for your application or fit for any particular purpose, or will operate in" at 6329.01,-830.67 h45
  text ".Layer_Name" at 577,-858.49 h60
  text "ALTIUM DESIGNER VERSION:" at 12848.5,-923.5 h45
  text "an implementation. TI and/or its licensors do not warrant that the design is production worthy. You should" at 6329.01,-943.33 h45
  text "completely validate and test your design implementation to confirm the system functionality for your application." at 6374,-1056 h45
  text ".print_Scale" at 11393.5,-1056.83 h70
  text ".Application_BuildNumber" at 12899,-1056.83 h70
  text "1" at 739.84,-1263.5 h70
  text "2" at 3235.5,-1263.5 h70
  text "3" at 5724.84,-1263.5 h70
  text "4" at 8231.51,-1263.5 h70
  text "5" at 10730.5,-1263.5 h70
  text "6" at 13235.5,-1263.5 h70
M10 Fab Notes:
  drawing of 212 lines, arcs and shapes, not listed
  text "DESIGN INFORMATION" at 12381.02,6810 h60
  text "(REFER ALSO ARRAY/PANEL PROFILING INFORMATION)" at 12019.46,6648.29 h60
  text "BOARD SIZE" at 11333.46,6644 h60
  text "2000MIL" at 11795.78,6516.18 h60
  text "X" at 12301.46,6516.18 h60
  text "1750MIL" at 12532.78,6516.18 h60
  text "Number of Layers :" at 11736.46,6319 h60
  text "2" at 12831.27,6309 h60
  text "MIN. TRACK WIDTH:" at 11736.46,6180 h60
  text "8" at 12832.7,6180 h60
  text "MIL" at 12987.46,6180 h60
  text "MIN. CLEARANCE:" at 11736.46,6048 h60
  text "8" at 12832.7,6048 h60
  text "MIL" at 12987.46,6048 h60
  text "MIN. VIA PAD SIZE:" at 11736.46,5916 h60
  text "24" at 12802.71,5916 h60
  text "MIL" at 12987.46,5916 h60
  text "0.05mm (2MIL)" at 12431.46,5774.29 h60
  text "MINIMUM ANNULAR RING" at 11407.23,5770 h60
  text "EXTERNAL" at 13139.46,5770 h60
  text "PER" at 11607.23,5652 h60
  text "IPC-D-275 CLASS 2 LEVEL C" at 11827.23,5652 h60
  text "MIL, HOLES" at 13315.46,5539.71 h60
  text "+/-" at 12923,5539 h60
  text "+/-" at 13777,5539 h60
  text "REGISTRATION TOLERANCES:" at 11407.23,5534 h60
  text "METAL" at 12607,5534 h60
  text "5" at 13183.2,5534 h60
  text "3" at 14016.2,5534 h60
  text "MIL" at 14132.46,5534 h60
  text "MATERIAL:" at 11332.46,5324.54 h60
  text "FR-4 High Tg" at 12318.9,5184.21 h60
  text "FR-408" at 11753.46,5175.64 h60
  text "X" at 12165.46,5175.64 h60
  text "OTHER" at 13241.46,5175.64 h60
  text "62 MIL (1.6mm) +/-10%" at 12073.56,5012.92 h60
  text "THICKNESS:" at 11407.23,5008.64 h60
  text "X" at 11945.4,5008.64 h60
  text "OTHER" at 13358.46,5008.64 h60
  text "TOLERANCE:" at 11407.23,4850.64 h60
  text "X" at 12246.53,4850.64 h60
  text "ANSI IPC-6012 TYPE 3 CLASS 2" at 12433.48,4850.64 h60
  text "OTHER +/-" at 12433.46,4694.64 h60
  text "BOW & TWIST:" at 11407.23,4537.64 h60
  text "X" at 12246.53,4537.64 h60
  text "ANSI IPC-6012 TYPE 3 CLASS 2" at 12433.48,4537.64 h60
  text "OTHER +/-" at 12433.46,4379.13 h60
  text "COPPER THICKNESS (FINISHED):" at 11332.46,4243.64 h60
  text "1.4MIL (1oz)" at 12212.46,4090.92 h60
  text "2MIL (1.4oz)" at 12979.46,4090.92 h60
  text "2.8MIL (2oz)" at 13706.46,4090.92 h60
  text "OUTER:" at 11689.46,4086.64 h60
  text "X" at 13580,4080 h60
  text "1.4MIL (1oz)" at 12212.46,3933.92 h60
  text "2.8MIL (2oz)" at 12979.46,3933.92 h60
  text "N/A" at 13706,3934.29 h60
  text "INNER SIGNAL:" at 11400.38,3929.64 h60
  text "X" at 13580,3930 h60
  text "DRILLING:" at 11332.46,3790.64 h60
  text "REFERENCE:" at 11407.23,3673.64 h60
  text "X" at 12055.46,3673.64 h60
  text "AS SHOWN" at 12242.46,3673.64 h60
  text "X" at 12956.46,3673.64 h60
  text "NC_DRILL FILES" at 13093.46,3673.64 h60
  text "PTH MIN COPPER THICKNESS:" at 11407.23,3515.64 h60
  text "X" at 12757.46,3515.64 h60
  text "1MIL" at 12894.46,3515.64 h60
  text "OTHER" at 13391.46,3515.64 h60
  text "BOARD FINISH:" at 11332.46,3356.64 h60
  text "SILKSCREEN:" at 11487.68,3238.64 h60
  text "X" at 12436.46,3238.64 h60
  text "TOP" at 12562.46,3238.64 h60
  text "X" at 12946.46,3238.64 h60
  text "BOTTOM" at 13073.46,3238.64 h60
  text "SILKSCREEN COLOR:" at 11487.68,3071.64 h60
  text "X" at 12435.42,3071.64 h60
  text "WHITE" at 12562.46,3071.64 h60
  text "OTHER" at 13073.46,3071.64 h60
  text "SOLDER RESIST COLOR:" at 11487.68,2901.64 h60
  text "GREEN" at 12182.46,2742.44 h60
  text "BLUE" at 12773.46,2742.44 h60
  text "OTHER" at 13311.46,2742.44 h60
  text "X" at 13160,2740 h60
  text "RED" at 13860,2740 h60
  text "IMMERSION GOLD (ENIG)" at 12393.46,2553.92 h60
  text "ENEPIG" at 13731,2550.64 h60
  text "SURFACE FINISH:" at 11332.46,2549.64 h60
  text "IMM. TIN/SILVER OR EQUIV" at 11662,2392.64 h60
  text "OTHER" at 13093.46,2392.64 h60
  text "X" at 11500,2390 h60
  text "ARRAY/PANEL:" at 11332.46,2213.64 h60
  text "CUT AND TRIM PER MECH LAYER 1" at 12393.46,2209.35 h60
  text "N.C. ROUTE" at 12393.46,2057.64 h60
  text "X" at 13072.46,2057.64 h60
  text "V. SCORE" at 13259.46,2057.64 h60
  text "CERTIFICATION:" at 11332.46,1920.64 h60
  text "MATERIALS AND WORKMANSHIP FOR ALL PCBS" at 12057.46,1920.64 h60
  text "TO MEET OR EXCEED THE REQUIREMENTS OF:" at 12057.46,1822.64 h60
  text "X" at 11683.96,1686.13 h60
  text "ANSI IPC-A-600F CLASS ->" at 11822.96,1686.13 h60
  text "X" at 13462.02,1686.13 h60
  text "2" at 13580.96,1686.14 h60
  text "1" at 13265.96,1684.64 h60
  text "3" at 13934.96,1684.64 h60
  text "X" at 11686.02,1526.64 h60
  text "UL 94V-0" at 11822.96,1526.64 h60
  text "X" at 12498.02,1526.64 h60
  text "RoHS" at 12634.96,1526.64 h60
  text "OTHER" at 13279.36,1526.64 h60
  text "PER ORDER" at 13676.42,1526.64 h60
  text "ADDITIONAL REQUIREMENTS:" at 11332.46,1385.64 h60
  text "MICROSECTION:" at 11407.23,1270.64 h60
  text "YES" at 12312.96,1270.64 h60
  text "REQUIRED" at 13174.46,1114.49 h60
  text "BARE BOARD ELEC. TEST:" at 11407.23,1111.64 h60
  text "NONE" at 12712.96,1111.64 h60
  text "PER ORDER" at 13766.46,1111.64 h60
  text "X" at 13640,1110 h60
  text "MANUFACTURER'S UL:" at 11407.23,954.64 h60
  text "RAIL" at 12572.96,950.35 h60
  text "METAL" at 13064.77,950.35 h60
  text "X" at 13440,950 h60
  text "SILK" at 13576.46,950.35 h60
  text ".Layer_Name" at 577,-858.49 h60
M11 Gerber Information:
  lines w10: -292,-930.17 6308,-930.17 ; -292,-726.83 6310,-726.83 ; -292,-523.5 -292,-1133.5 3713,-1133.5 6310,-1133.5 6310,-523.5 -291.5,-523.5 -291.5,-1133.5 1284,-1133.5 ; 2173,-1133.5 2173,-523.5 ; 3440,-726.83 3440,-523.5 ; 4280,-726.83 4280,-523.5 ; 4902,-1140 4902,-937.17
  text "ALL ARTWORK VIEWED FROM TOP SIDE" at -228.5,-655.67 h60
  text "BOARD #:" at 2248,-655.67 h60
  text ".PRJ_Number" at 2793.5,-655.67 h60
  text "REV:" at 3638,-655.67 h60
  text ".PCB_Rev" at 3929.5,-655.67 h60
  text "SVN REV:" at 4476,-655.67 h60
  text ".VersionControl_RevNumber" at 4982,-655.67 h60
  text "LAYER NAME =" at -228.5,-858.49 h60
  text "PLOT NAME =" at -228.5,-1064.34 h60
  text ".plot_File_Name" at 577,-1064.34 h60
  text "GENERATED    :" at 2250,-1064.34 h60
  text ".Print_Date" at 3119.5,-1064.34 h60
  text ".Print_Time" at 3848.5,-1064.34 h60
  text "TEXAS INSTRUMENTS" at 5113,-1064.34 h60
M12 Stackup:
  lines w6: 11360,7460 13910,7460 ; 11360,7564.4 13910,7564.4 ; 11300,6975 ccw(c11334,6975) 11334,6941 13936,6941 ccw(c13936,6975) 13970,6975 13970,7681 ccw(c13936,7681) 13936,7715 11334,7715 ccw(c11334,7681) 11300,7681 11300,6975
  text "The Stackup Legend below this is static." at 11605.5,7874.5 h60
  text "If you change the stackup, update the Legend." at 11615.5,7784.5 h60
  text "Layer Stack Up Detail for: Ref_Design.PcbDoc" at 11360,7597.1 h57
  text "Layer" at 11360,7525.4 h24
  text "Gerber" at 12255.81,7525.4 h24
  text "Copper" at 12819.33,7525.4 h24
  text "Dielectric" at 13422.04,7525.4 h24
  text "Name" at 11360,7477.4 h24
  text "Document" at 12255.81,7477.4 h24
  text "Thickness" at 12819.33,7477.4 h24
  text "Material" at 13422.04,7477.4 h24
  text "Top Solder Mask" at 11360,7384.44 h34
  text "(.GTS)" at 12255.81,7384.44 h34
  text "Solder Resist" at 13422.04,7384.44 h34
  text "Top Layer" at 11360,7287.69 h34
  text "(.GTL)" at 12255.81,7287.69 h34
  text "1.4mil" at 12819.33,7287.69 h34
  text "FR-4" at 13422.04,7239.31 h34
  text "Bottom Layer" at 11360,7190.94 h34
  text "(.GBL)" at 12255.81,7190.94 h34
  text "1.4mil" at 12819.33,7190.94 h34
  text "Bottom Solder Mask" at 11360,7094.19 h34
  text "(.GBS)" at 12255.81,7094.19 h34
  text "Solder Resist" at 13422.04,7094.19 h34
  text ".Layer_Name" at 577,-858.49 h60
M13 Component Bodies Top:
  lines w5: 777.72,1335.03 777.72,1380
  text ".Layer_Name" at 577,-858.49 h60
M14 Component Bodies Bottom:
  text ".Layer_Name" at 577,-858.49 h60
M15 Courtyards Top:
  text ".Layer_Name" at 577,-858.49 h60
M16 Courtyards Bottom:
  text ".Layer_Name" at 577,-858.49 h60
Drill Drawing:
  lines w7: -90,2838.5 2110,2838.5 ; -90,2968.5 2110,2968.5 ; -150,1897 ccw(c-108,1897) -108,1855 2128,1855 ccw(c2128,1897) 2170,1897 2170,3283 ccw(c2128,3283) 2128,3325 -108,3325 ccw(c-108,3283) -150,3283 -150,1897
  text "Layer Stack Up Detail for: BOOST-DRV8711.PcbDoc" at -90,3113.45 h46
  text "Layer" at -90,2920 h30
  text "Gerber" at 699.1,2920 h30
  text "Copper" at 1082.34,2920 h30
  text "Dielectric" at 1514.55,2920 h30
  text "Name" at -90,2860 h30
  text "Document" at 699.1,2860 h30
  text "Thickness" at 1082.34,2860 h30
  text "Material" at 1514.55,2860 h30
  text "Top Solder Mask" at -90,2737.5 h42
  text "(.GTS)" at 699.1,2737.5 h42
  text "Solder Resist" at 1514.55,2737.5 h42
  text "Top Layer" at -90,2542.5 h42
  text "(.GTL)" at 699.1,2542.5 h42
  text "2.8mil" at 1082.34,2542.5 h42
  text "FR-4" at 1514.55,2445 h42
  text "Bottom Layer" at -90,2347.5 h42
  text "(.GBL)" at 699.1,2347.5 h42
  text "2.8mil" at 1082.34,2347.5 h42
  text "Bottom Solder Mask" at -90,2152.5 h42
  text "(.GBS)" at 699.1,2152.5 h42
  text "Solder Resist" at 1514.55,2152.5 h42
  text "*Special Note: RED Solder Resist, TI BoosterPack" at -80,1980 h42
  text ".legend" at 2302.5,785.5 h60
  text "Drill Table" at 2327.5,600.5 h60
  text ".Layer_Name" at 577,-858.49 h60

## Dimensions
0,0 to 0,1750 on M2 Board Dimensions
0,0 to 2000,0 on M2 Board Dimensions

## Text inside footprints (layer, text, board x,y; h text height)
C1: Top Overlay "+" at 330,1230 h59.06 r90
R6: M5 Assembly Top "CCW" at 555,45 h30 r90; M5 Assembly Top "CW" at 360,80 h30 r90